# EAGLE board StellaBlue_v04 (EAGLE 9.1.0)
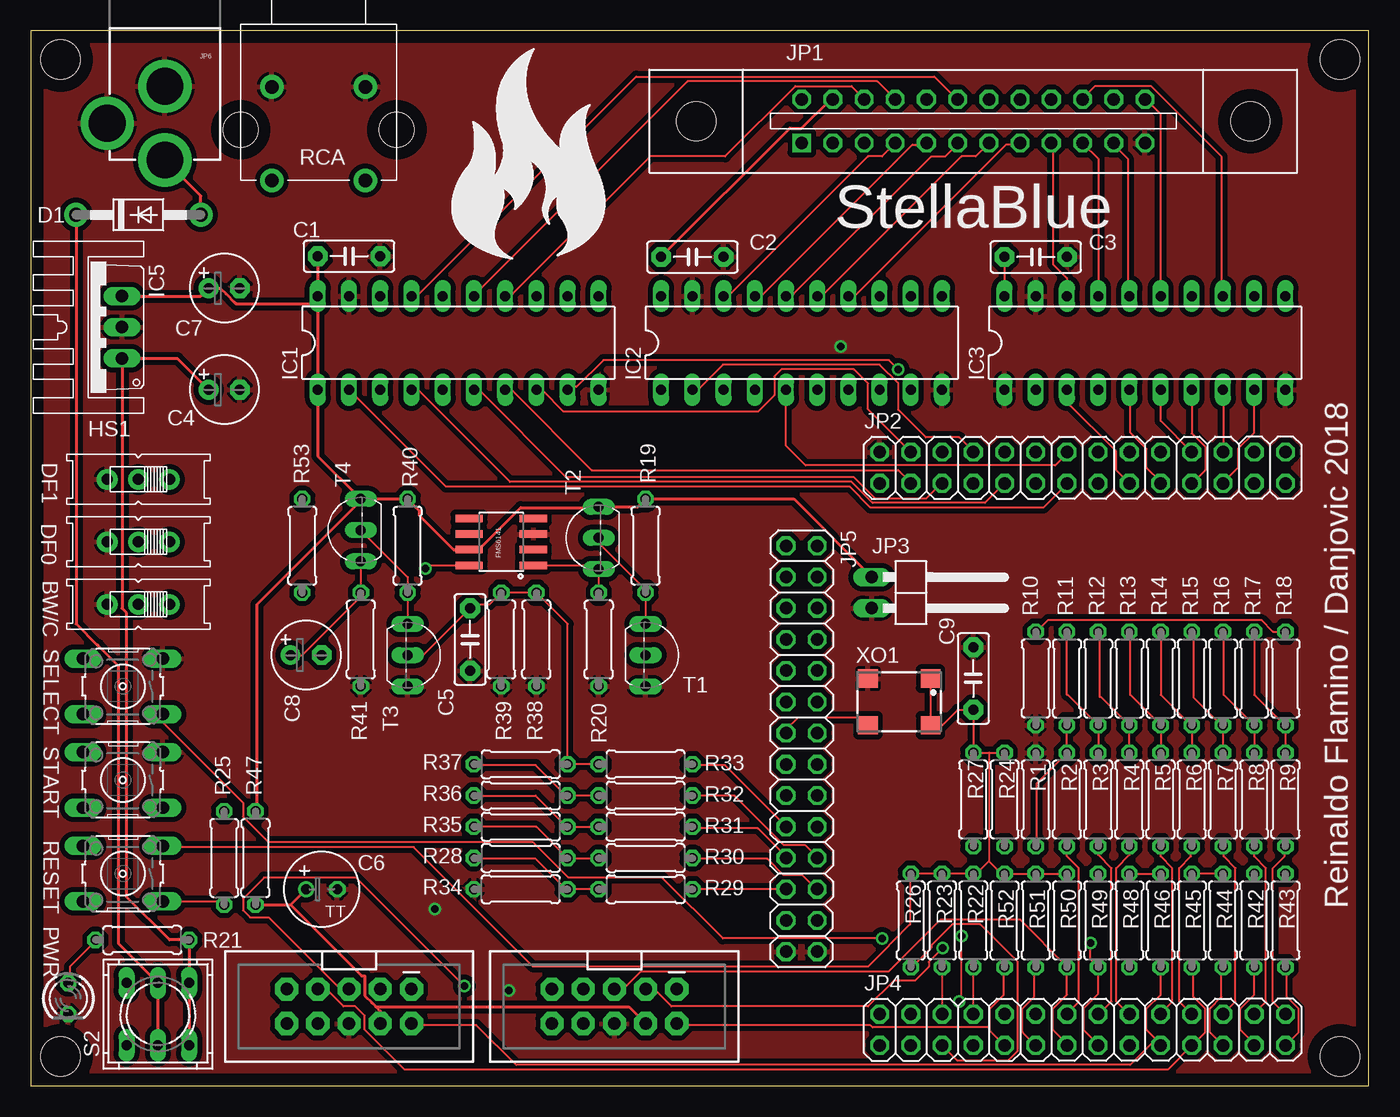
[diagram p0: board, top side]
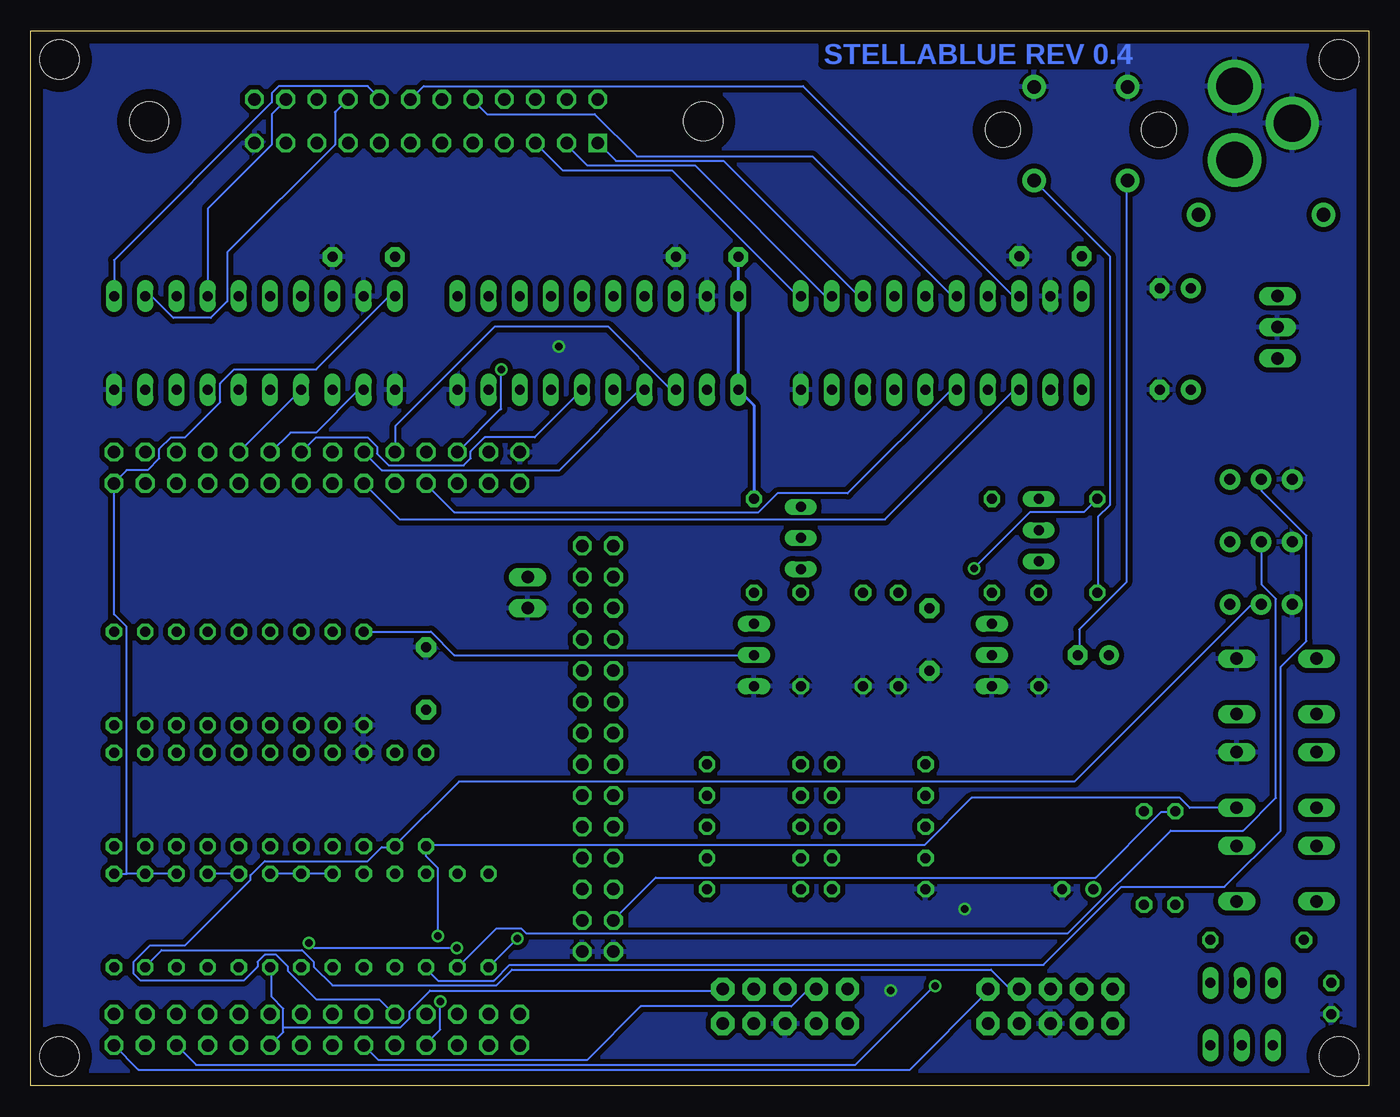
[diagram p1: board, bottom side, seen from below]

Size 108.89 x 85.84 mm. Coordinates in mm from the lower left corner, seen from the top.
Outline: 0,0 108.89,0 108.89,85.84 0,85.84 0,0
Copper layers (1*16): Top 0.035mm / dielectric 1.5mm / Bottom 0.035mm
Design rules "default *": minimum track width 7mil, minimum drill 24mil, track to track 8mil, track to pad 8mil, pad to pad 8mil, via to via 8mil, smd to smd 8mil, copper to edge 40mil, drill to drill 8mil, minimum pad ring 10mil, minimum via ring 8mil, stop-mask expansion 4mil, vias tented up to drill 0mil, thermal gap 10mil
Holes 3.2 mm at 2.41,83.5 2.41,2.41 106.55,2.41 106.55,83.5

## Footprints (pad centres in the part's own frame; a part is rotated, then mirrored left to right if it is on the bottom)
EG1218 = drill 0.9 pad 1.676: O -2.54,0; P 0,0; S 2.54,0
C5B2.5 = drill 0.813 pad 1.6 octagon: 1 -2.54,0; 2 2.54,0
E2,5-6 = drill 0.813 pad 1.6: + -1.27,0 | drill 0.813 pad 1.6 octagon: - 1.27,0
TT2D6 = drill 0.813: + -1.27,0 | drill 0.813 octagon: - 1.27,0
DO41-10 = drill 1.118 pad 1.93: A 5.08,0; C -5.08,0
SO08 = smd 0.61 x 2.21: 1 -1.905,-2.616; 2 -0.635,-2.616; 3 0.635,-2.616; 4 1.905,-2.616; 5 1.905,2.616; 6 0.635,2.616; 7 -0.635,2.616; 8 -1.905,2.616
DIL20 = drill 0.813 long: 1 -11.43,-3.81; 2 -8.89,-3.81; 3 -6.35,-3.81; 4 -3.81,-3.81; 5 -1.27,-3.81; 6 1.27,-3.81; 7 3.81,-3.81; 8 6.35,-3.81; 9 8.89,-3.81; 10 11.43,-3.81; 11 11.43,3.81; 12 8.89,3.81; 13 6.35,3.81; 14 3.81,3.81; 15 1.27,3.81; 16 -1.27,3.81; 17 -3.81,3.81; 18 -6.35,3.81; 19 -8.89,3.81; 20 -11.43,3.81
TO220V = drill 1.016 long: 1 -2.54,-2.54; 2 0,-2.54; 3 2.54,-2.54
2X5-SHROUDED_LOCK = drill 1.016 pad 1.88 octagon: 1 -1.397,5.08; 2 1.397,5.08; 3 -1.397,2.54; 4 1.397,2.54; 5 -1.397,0; 6 1.397,0; 7 -1.397,-2.54; 8 1.397,-2.54; 9 -1.397,-5.08; 10 1.397,-5.08
ATARI2600_SLOT = drill 1.016 square: 1 -13.97,-1.778 | drill 1.016 octagon: 2 -13.97,1.778; 3 -11.43,-1.778; 4 -11.43,1.778; 5 -8.89,-1.778; 6 -8.89,1.778; 7 -6.35,-1.778; 8 -6.35,1.778; 9 -3.81,-1.778; 10 -3.81,1.778; 11 -1.27,-1.778; 12 -1.27,1.778; 13 1.27,-1.778; 14 1.27,1.778; 15 3.81,-1.778; 16 3.81,1.778; 17 6.35,-1.778; 18 6.35,1.778; 19 8.89,-1.778; 20 8.89,1.778; 21 11.43,-1.778; 22 11.43,1.778; 23 13.97,-1.778; 24 13.97,1.778 | hole 3.175: -22.543,0; 22.543,0
2X14 = drill 1.016 octagon: 1 -16.51,-1.27; 2 -16.51,1.27; 3 -13.97,-1.27; 4 -13.97,1.27; 5 -11.43,-1.27; 6 -11.43,1.27; 7 -8.89,-1.27; 8 -8.89,1.27; 9 -6.35,-1.27; 10 -6.35,1.27; 11 -3.81,-1.27; 12 -3.81,1.27; 13 -1.27,-1.27; 14 -1.27,1.27; 15 1.27,-1.27; 16 1.27,1.27; 17 3.81,-1.27; 18 3.81,1.27; 19 6.35,-1.27; 20 6.35,1.27; 21 8.89,-1.27; 22 8.89,1.27; 23 11.43,-1.27; 24 11.43,1.27; 25 13.97,-1.27; 26 13.97,1.27; 27 16.51,-1.27; 28 16.51,1.27
1X02/90 = drill 1.016 long: 1 -1.27,-3.81; 2 1.27,-3.81
POWER_JACK_PTH = drill 2.997 pad 4.318: GND 0,7.7; GNDBREAK 4.7,10.7; PWR 0,13.7
LED3MM = drill 0.813 octagon: A -1.27,0; K 1.27,0
0207/7 = drill 0.813 octagon: 1 -3.81,0; 2 3.81,0
DOUBLE-VERTICAL = drill 1.1 pad 1.93: HG -3.81,3.81; HS -3.81,-3.81; LG 3.81,3.81; LS 3.81,-3.81 | hole 2.8: -6.35,0.318; 6.35,0.318
B3F-10XX = drill 1.016 long: 1 -3.251,2.261; 2 3.251,2.261; 3 -3.251,-2.261; 4 3.251,-2.261
9077-2 = drill 0.813 long: 1 -2.54,2.54; 2 0,2.54; 3 2.54,2.54; 4 -2.54,-2.54; 5 0,-2.54; 6 2.54,-2.54
TO92-EBC = drill 0.813 long: B 0,-1.27; C 2.54,-1.27; E -2.54,-1.27
SM77H = smd 1.6 x 1.5: 1 -2.55,-1.9; 2 2.55,-1.9; 3 2.55,1.9; 4 -2.55,1.9

## Placement (x,y rotation side)
BW/C  [EG1218]  8.76,39.18 180 top
C1  100nf  [C5B2.5]  25.91,67.5 0 top
C2  100nf  [C5B2.5]  53.85,67.44 0 top
C3  100nf  [C5B2.5]  81.79,67.44 0 top
C4  10uf  [E2,5-6]  15.75,56.64 0 top
C5  11nf  [C5B2.5]  35.75,36.32 270 top
C6  10uf  [TT2D6]  23.69,16 0 top
C7  10uf  [E2,5-6]  15.75,64.9 0 top
C8  10uf  [E2,5-6]  22.42,35.05 0 top
C9  10nf  [C5B2.5]  76.71,33.15 90 top
D1  1N4004  [DO41-10]  8.76,70.87 0 top
DF0  [EG1218]  8.76,44.26 180 top
DF1  [EG1218]  8.76,49.34 180 top
FMS6141  GENERIC-SOIC8MSGEQ7N-FILTER  [SO08]  38.29,44.26 90 top
HS1  AA  [AA]  0.19,61.72 270 top
IC1  74LS245N  [DIL20]  34.8,60.45 0 top
IC2  74LS245N  [DIL20]  62.74,60.45 0 top
IC3  74LS245N  [DIL20]  90.68,60.45 0 top
IC5  7805TV  [TO220V]  4.89,61.72 90 top
JOY1  JOY1  [2X5-SHROUDED_LOCK]  25.91,6.48 270 top
JOY2  JOY2  [2X5-SHROUDED_LOCK]  47.5,6.48 270 top
JP1  CARTRIDGE SOCKET  [ATARI2600_SLOT]  76.71,78.49 0 top
JP2  [2X14]  85.6,50.29 0 top
JP3  [1X02/90]  72.26,40.13 270 top
JP4  [2X14]  85.6,4.57 0 top
JP5  [2X14]  62.74,27.43 270 top
JP6  POWER_JACKPTH  [POWER_JACK_PTH]  10.92,89.03 180 top
PWR  [LED3MM]  3.05,7.11 270 top
R1  2k  [0207/7]  81.79,23.3 90 top
R2  2k  [0207/7]  84.33,23.3 90 top
R3  2k  [0207/7]  86.87,23.3 90 top
R4  2k  [0207/7]  89.41,23.3 90 top
R5  2k  [0207/7]  91.95,23.3 90 top
R6  2k  [0207/7]  94.49,23.3 90 top
R7  2k  [0207/7]  97.03,23.3 90 top
R8  2k  [0207/7]  99.57,23.3 90 top
R9  2k  [0207/7]  102.11,23.3 90 top
R10  2k  [0207/7]  81.79,33.15 90 top
R11  1k  [0207/7]  84.33,33.15 270 top
R12  1k  [0207/7]  86.87,33.15 270 top
R13  1k  [0207/7]  89.41,33.15 270 top
R14  1k  [0207/7]  91.95,33.15 270 top
R15  1k  [0207/7]  94.49,33.15 270 top
R16  1k  [0207/7]  97.03,33.15 270 top
R17  1k  [0207/7]  99.57,33.15 270 top
R18  1k  [0207/7]  102.11,33.15 270 top
R19  1k  [0207/7]  50.04,43.94 90 top
R20  1k  [0207/7]  46.23,36.32 90 top
R21  1k  [0207/7]  9.08,11.87 0 top
R22  1k  [0207/7]  76.71,13.46 90 top
R23  1k  [0207/7]  74.17,13.46 90 top
R24  1k  [0207/7]  79.25,23.3 90 top
R25  1k  [0207/7]  15.75,18.54 270 top
R26  1k  [0207/7]  71.63,13.46 90 top
R27  1k  [0207/7]  76.71,23.3 90 top
R28  2k  [0207/7]  39.88,16 0 top
R29  2k  [0207/7]  50.04,16 180 top
R30  2k  [0207/7]  50.04,18.54 180 top
R31  2k  [0207/7]  50.04,21.08 180 top
R32  2k  [0207/7]  50.04,23.62 180 top
R33  2k  [0207/7]  50.04,26.16 180 top
R34  1k  [0207/7]  39.88,18.54 180 top
R35  1k  [0207/7]  39.88,21.08 180 top
R36  1k  [0207/7]  39.88,23.62 180 top
R37  1k  [0207/7]  39.88,26.16 180 top
R38  1k  [0207/7]  41.15,36.32 90 top
R39  1k  [0207/7]  38.29,36.32 90 top
R40  1k  [0207/7]  30.67,43.94 90 top
R41  1k  [0207/7]  26.86,36.32 90 top
R42  1k  [0207/7]  99.57,13.46 270 top
R43  1k  [0207/7]  102.11,13.46 270 top
R44  1k  [0207/7]  97.03,13.46 270 top
R45  1k  [0207/7]  94.49,13.46 270 top
R46  1k  [0207/7]  91.95,13.46 270 top
R47  1k  [0207/7]  18.29,18.54 90 top
R48  1k  [0207/7]  89.41,13.46 270 top
R49  1k  [0207/7]  86.87,13.46 270 top
R50  1k  [0207/7]  84.33,13.46 270 top
R51  1k  [0207/7]  81.79,13.46 270 top
R52  1k  [0207/7]  79.25,13.46 270 top
R53  75  [0207/7]  22.1,43.94 90 top
RCA  DOUBLE_VERTICAL  [DOUBLE-VERTICAL]  23.43,77.47 0 top
RESET  [B3F-10XX]  7.49,17.27 180 top
S2  PWR-SW  [9077-2]  10.35,5.84 180 top
SELECT  [B3F-10XX]  7.49,32.51 180 top
START  [B3F-10XX]  7.49,24.89 180 top
T1  2N3906  [TO92-EBC]  51.31,35.05 270 top
T2  2N3904  [TO92-EBC]  44.96,44.58 90 top
T3  2N3906  [TO92-EBC]  31.94,35.05 270 top
T4  2N3904  [TO92-EBC]  25.59,45.21 90 top
XO1  14.318MHz  [SM77H]  70.68,31.24 180 top

## Library data of the parts
BW/C D1 DF0 DF1 = adafruit
C1-C3 C5 C9 = capacitor-wima
C4 C6-C8 R1-R53 = resistor
FMS6141 = SparkFun-AnalogIC; PROD_ID: IC-10141
HS1 = heatsink
IC1-IC3 = 74xx-us
IC5 = linear
JOY1 JOY2 = SparkFun-Connectors
JP1 = atari2600 card edge
JP2-JP5 = pinhead
JP6 = SparkFun-Connectors; PROD_ID: CONN-08197
PWR = led
RCA = con-rca-board
RESET SELECT START = switch-omron; MPN: B3F-1000; OC_FARNELL: 176432; OC_NEWARK: 36M3542
S2 = switch-misc
T1-T4 = transistor-neu-to92
XO1 = crystal

## Nets
14.318MHZ: JP5.13 XO1.3
+3V3: C3.1 C9.1 IC3.20 JP2.27 R22.2 R23.2 R24.2 R26.2 R27.2 R42.1 R43.1 R44.1 R45.1 R46.1 R48.1 R49.1 R50.1 R51.1 R52.1 RESET.3 XO1.1 XO1.4
+5V: C1.1 C2.1 C7.+ FMS6141.7 IC1.1 IC1.20 IC2.1 IC2.20 IC5.3 JP1.4 JP3.1 R19.2 R40.2 R47.2 T2.C T4.C
AD0: JP5.23 R29.1
AD1: JP5.24 R30.1
AD2: JP5.21 R31.1
AD3: JP5.22 R32.1
AD4: JP5.19 R33.1
ADO: C5.1 R33.2 R37.1 R38.2 R39.2 T3.B
AUDIO: C8.+ R41.2 T4.E
CL: BW/C.P JP4.10 R24.1
CV: R10.2 R18.1 T1.B
CV0: JP4.14 R2.1
CV1: JP4.16 R3.1
CV2: JP4.18 R4.1
CV3: JP4.20 R5.1
CV4: JP4.22 R6.1
CV5: JP4.24 R7.1
CV6: JP4.26 R8.1
CV7: JP4.28 R9.1
CVOUT: FMS6141.1 R20.2 T2.E
DF0: DF0.P JP4.6 R23.1
DF1: DF1.P JP4.8 R22.1
GND: BW/C.S C1.2 C2.2 C3.2 C4.- C5.2 C6.- C7.- C9.2 DF0.S DF1.S FMS6141.3 IC1.10 IC1.19 IC2.10 IC2.19 IC3.1 IC3.10 IC3.19 IC5.2 JOY1.6 JOY2.6 JP1.23 JP2.2 JP3.2 JP5.27 JP5.28 JP6.GND JP6.GNDBREAK PWR.K R1.2 R10.1 R20.1 R28.1 R38.1 R39.1 R41.1 RCA.HG RCA.LG SELECT.3 START.3 T1.C T3.C XO1.2
J+5V: C6.+ JOY1.4 JOY2.4 R47.1
JD2: JOY2.3 JP4.15 R49.2
JDW: JOY1.3 JP4.25 R42.2
JF2: JOY2.2 JP4.9 R52.2
JFR: JOY1.2 JP4.19 R46.2
JL2: JOY2.5 JP4.13 R50.2
JLF: JOY1.5 JP4.23 R44.2
JR2: JOY2.7 JP4.11 R51.2
JRG: JOY1.7 JP4.21 R45.2
JU2: JOY2.1 JP4.17 R48.2
JUP: JOY1.1 JP4.27 R43.2
N$1: IC1.18 JP1.14
N$2: IC1.17 JP1.12
N$3: IC1.16 JP1.10
N$4: IC1.15 JP1.8
N$5: IC1.14 JP1.6
N$6: IC1.13 JP1.1
N$7: IC1.12 JP1.3
N$8: IC1.11 JP1.5
N$9: IC2.18 JP1.7
N$10: IC2.17 JP1.9
N$11: IC2.16 JP1.11
N$12: IC2.15 JP1.13
N$13: IC2.14 JP1.15
N$14: IC3.18 JP1.17
N$15: IC3.17 JP1.19
N$16: IC3.16 JP1.21
N$17: IC3.15 JP1.24
N$18: IC3.14 JP1.22
N$19: IC3.13 JP1.20
N$20: IC3.12 JP1.18
N$21: IC3.11 JP1.16
N$22: IC1.2 JP2.13
N$23: IC1.3 JP2.11
N$24: IC1.4 JP2.9
N$25: IC1.5 JP2.7
N$26: IC1.6 JP2.5
N$27: IC1.7 JP2.3
N$28: IC1.8 JP2.4
N$29: IC1.9 JP2.6
N$30: IC2.2 JP2.8
N$31: IC2.3 JP2.10
N$32: IC2.4 JP2.12
N$33: IC2.5 JP2.14
N$34: IC2.6 JP2.16
N$35: IC3.2 JP2.18
N$36: IC3.3 JP2.17
N$37: IC3.4 JP2.20
N$38: IC3.5 JP2.19
N$39: IC3.6 JP2.22
N$40: IC3.7 JP2.21
N$41: IC3.8 JP2.24
N$42: IC3.9 JP2.23
N$43: D1.A JP6.PWR
N$44: D1.C S2.2 S2.5
N$45: R1.1 R2.2 R11.2
N$46: R3.2 R11.1 R12.2
N$47: R53.1 RCA.LS
N$49: C4.+ IC5.1 R21.2 S2.1 S2.4
N$50: R4.2 R12.1 R13.2
N$51: R5.2 R13.1 R14.2
N$52: R6.2 R14.1 R15.2
N$53: R7.2 R15.1 R16.2
N$54: R8.2 R16.1 R17.2
N$55: R9.2 R17.1 R18.2
N$57: R19.1 T1.E T2.B
N$58: PWR.A R21.1
N$59: R25.2 RESET.1
N$62: R28.2 R29.2 R34.2
N$63: R30.2 R34.1 R35.2
N$64: R31.2 R35.1 R36.2
N$65: R32.2 R36.1 R37.2
N$67: R40.1 T3.E T4.B
N$68: C8.- RCA.HS
RST: JP5.25 R25.1
SL: JP4.5 R26.1 SELECT.1
ST: JP4.7 R27.1 START.1
VIDEO: FMS6141.8 R53.2

## Tracks (layer width: path | path; a pad name or v marks a point on that pad's centre or on a via)
14.318MHZ
  Top 0.178: XO1.3 67.49,29.97 62.42,29.97 61.47,29.02 JP5.13
+3V3
  Top 0.178: R44.1 R45.1 | XO1.1 XO1.4 74.17,29.34 75.44,30.61 C9.1 R27.2 77.98,27.11 | 77.98,27.11 R24.2 | 77.98,27.11 77.98,18.29 | 77.98,18.29 78.99,17.27 R52.1 R51.1 R50.1 | R48.1 R46.1 | 77.98,18.29 76.96,17.27 R22.2 R23.2 R26.2 71.56,17.21 71.56,13.14 68.13,9.72 40.89,9.72 31.18,19.43 10.85,19.43 RESET.3 | C3.1 IC3.20
  Bottom 0.178: R50.1 R49.1 R48.1 | R46.1 R45.1 | R44.1 R42.1 101.03,17.27 | 101.03,17.27 101.09,17.34 101.09,37.34 102.11,38.35 102.11,49.09 | R43.1 101.03,17.27 | IC3.20 79.31,64.2 79.76,64.2 85.66,58.29 92.33,58.29 93.47,57.15 93.47,55.63 96.33,52.77 97.47,52.77 98.42,51.82 98.42,51.05 99.38,50.1 101.09,50.1 102.11,49.09 | 102.11,49.09 JP2.27
+5V
  Top 0.178: 65.28,80.2 JP1.4
  Top 0.254: 23.37,63.63 IC1.1 23.37,51.24 T4.C | 23.37,63.63 16.7,63.63 16.56,63.77 16.55,63.77 15.89,64.43 15.89,64.44 15.43,64.9 C7.+ 13.84,64.26 IC5.3 | T4.C R40.2 31.62,46.8 31.62,46.43 34.43,43.62 FMS6141.7 36.45,43.62 39.88,47.05 46.16,47.05 T2.C 49.4,47.12 R19.2 62.1,47.75 JP3.1 | 18.41,39.18 26.86,47.62 T4.C | C2.1 61.79,77.92 62.74,77.92 65.02,80.2 65.28,80.2 | 18.41,39.18 | R47.2 18.41,22.48 18.41,39.18 | C1.1 IC1.20 23.37,63.63
  Bottom 0.254: R19.2 50.04,55.37 IC2.1 IC2.20 C2.1
AD0
  Top 0.178: JP5.23 R29.1
AD1
  Top 0.178: R30.1 53.85,18.48 59.94,18.48 61.28,17.14 62.8,17.14 63.95,16 JP5.24
AD2
  Top 0.178: R31.1 53.85,20.96 59.18,20.96 61.47,18.67 JP5.21
AD3
  Top 0.178: R32.1 57.28,23.62 61.28,19.62 62.99,19.62 64.01,18.61 JP5.22
AD4
  Top 0.178: R33.1 53.85,26.1 56.52,26.1 61.47,21.15 JP5.19
ADO
  Top 0.178: T3.B 31.94,35.05 C5.1 36.07,39.18 37.34,39.18 R39.2 R38.2 43.69,37.59 R37.1 R33.2
AUDIO
  Top 0.178: T4.E R41.2 26.86,39.81 22.1,35.05 C8.+
CL
  Bottom 0.178: BW/C.P 8.89,39.05 9.65,39.05 23.94,24.77 74.04,24.77 79.31,19.5 79.31,19.43 | 79.31,19.43 80.33,19.43 81.47,18.29 89.85,18.29 90.99,17.14 90.99,16.76 96.33,11.43 99.19,11.43 100.52,10.1 100.52,9.14 99.95,8.57 91.57,8.57 90.42,9.72 90.42,10.1 89.85,10.67 88.9,10.67 87.95,9.72 87.95,9.33 85.66,7.05 80.52,7.05 79.31,5.84 JP4.10 | 79.31,19.43 R24.1
CV
  Top 0.178: R18.1 101.09,36.96 100.14,37.91 82.8,37.91 81.85,36.96 R10.2
  Bottom 0.178: T1.B 74.42,35.05 76.33,36.96 R10.2
CV0
  Top 0.178: R2.1 84.33,18.67 85.28,17.72 85.28,6.86 84.33,5.91 JP4.14
CV1
  Top 0.178: R3.1 86.87,18.8 87.95,17.72 87.95,6.86 86.93,5.84 JP4.16
CV2
  Top 0.178: JP4.18 89.34,5.84 88.33,6.86 88.33,17.72 89.41,18.8 R4.1
CV3
  Top 0.178: R5.1 91.95,18.67 92.9,17.72 92.9,6.86 91.95,5.91 JP4.20
CV4
  Top 0.178: JP4.22 93.47,6.86 93.47,17.72 94.42,18.67 94.42,19.43 R6.1
CV5
  Top 0.178: JP4.24 98.04,6.86 98.04,17.72 97.09,18.67 97.09,19.43 R7.1
CV6
  Top 0.178: R8.1 99.57,18.67 100.52,17.72 100.52,6.86 99.57,5.91 JP4.26
CV7
  Top 0.178: JP4.28 101.09,6.86 101.09,17.72 102.05,18.67 102.05,19.43 R9.1
CVOUT
  Top 0.178: FMS6141.1 45.91,42.36 T2.E R20.2
DF0
  Top 0.178: R23.1 JP4.6
  Bottom 0.178: DF0.P 8.7,44.2 8.7,40.77 7.56,39.62 7.56,23.43 10.22,20.77 16.13,20.77 24.51,12.38 68.53,12.38 68.95,12.8 71.02,12.8 R23.1
DF1
  Top 0.178: JP4.8 R22.1
  Bottom 0.178: DF1.P 8.7,49.34 8.7,48.39 5.08,44.77 5.08,36.2 7.18,34.1 7.18,20.77 11.75,16.19 20.13,16.19 26.48,9.84 69.91,9.84 71.18,8.57 75.76,8.57 76.71,9.53 R22.1
GND  (via drill 0.61)
  other vias: 38.93,7.75 32.89,14.41 65.91,60.13
  pour Bottom (isolate 0.406): 0,86.17 108.97,86.17 108.97,0 0,0
  pour Top (isolate 0.406): 0.32,85.85 109.28,85.85 108.97,0 0,0
J+5V
  Top 0.254: R47.1 21.14,14.73 | 21.14,14.73 C6.+ | 21.14,14.73 26.92,8.95 27.18,8.95 27.18,7.35 27.77,6.75 28.09,6.44 | JOY1.4 28.45,6.08 28.09,6.44 | 28.09,6.44 48.68,6.44 JOY2.4
JD2  (via drill 0.61)
  Top 0.178: v74.23,11.24 73.09,10.1 73.09,9.72 71.95,8.57 70.23,8.57 68.13,6.48 52.13,6.48 50.8,7.81 50.04,7.81 JOY2.3 | v86.23,11.62 86.23,10.29 R49.2 86.87,7.49 85.66,6.29 85.66,4.57 86.87,3.37 JP4.15
  Bottom 0.178: v74.23,11.24 85.85,11.24 v86.23,11.62
JDW
  Top 0.178: R42.2 99.57,7.43 98.42,6.29 98.42,4.57 99.57,3.43 JP4.25
  Bottom 0.178: R42.2 99.57,9.72 98.23,11.05 86.8,11.05 85.85,10.1 85.85,9.72 84.33,8.19 70.99,8.19 69.72,9.46 30.73,9.46 29.27,8 28.57,8 JOY1.3
JF2
  Top 0.178: 78.04,4.76 78.04,6.29 79.19,7.43 79.19,9.59 R52.2 | 78.04,4.76 68.52,4.76 68.33,4.95 52.71,4.95 JOY2.2 | JP4.9 78.04,4.51 78.04,4.76
JFR
  Top 0.178: R46.2 91.95,7.43 90.8,6.29 90.8,4.57 91.57,3.81 | 91.57,3.81 89.47,1.71 39.5,1.71 36.26,4.95 30.99,4.95 JOY1.2 | JP4.19 91.95,3.43 91.57,3.81
JL2
  Top 0.178: JP4.13 84.33,3.43 83.19,4.57 83.19,6.29 84.33,7.43 R50.2 84.33,9.72 80.52,13.53 74.04,13.53 69.85,9.33 49.66,9.33 48.2,7.87 JOY2.5
JLF  (via drill 0.61)
  Top 0.178: JP4.23 95.95,4.38 95.95,6.29 96.9,7.24 96.9,9.53 R44.2 | v35.31,8.13 26.48,16.95 18.99,16.95 17.27,15.24 17.27,14.29 17.84,13.72 19.37,13.72 25.08,8 25.78,8 JOY1.5
  Bottom 0.178: v35.31,8.13 35.37,8.13 41.78,1.71 95.44,1.71 JP4.23
JR2
  Top 0.178: R51.2 81.66,9.53 81.66,7.24 80.71,6.29 80.71,4.38 JP4.11
  Bottom 0.178: JOY2.7 45.59,7.87 46.99,6.48 59.25,6.48 63.63,2.09 80.58,2.09 JP4.11
JRG
  Top 0.178: R45.2 94.61,9.53 94.61,7.24 95.57,6.29 95.57,4.38 JP4.21 92.52,1.33 30.42,1.33 27.18,4.57 27.18,5.71 26.42,6.48 25.46,6.48 24.13,7.81 23.37,7.81 JOY1.7
JU2
  Bottom 0.178: 88.33,4.76 88.33,4.38 JP4.17 | 88.33,4.76 88.33,6.29 89.28,7.24 89.28,9.53 R48.2 | 88.33,4.76 78.8,4.76 78.04,5.53 78.04,6.1 76.39,7.75 52.71,7.75 JOY2.1
JUP
  Top 0.178: JP4.27 103.19,4.38 103.19,6.29 102.23,7.24 102.23,9.53 R43.2
  Bottom 0.178: JP4.27 100.14,1.33 37.34,1.33 30.99,7.68 JOY1.1
N$1
  Bottom 0.178: JP1.14 76.9,81.34 46.04,81.34 29.08,64.39 28.57,64.39 IC1.18
N$2
  Top 0.178: IC1.17 30.99,64.39 31.56,64.39 49.28,82.11 73.53,82.11 75.38,80.26 JP1.12
N$3
  Bottom 0.178: IC1.16 33.66,64.39 34.04,64.39 45.28,75.63 59.56,75.63 62.99,79.06 71.75,79.06 72.9,80.2 JP1.10
N$4
  Top 0.178: JP1.8 68.9,81.72 53.47,81.72 36.07,64.33 IC1.15
N$5
  Top 0.178: IC1.14 38.61,64.39 39.18,64.39 50.42,75.63 56.52,75.63 62.23,81.34 66.8,81.34 67.82,80.33 JP1.6
N$6
  Bottom 0.178: JP1.1 61.28,75.25 52.52,75.25 41.66,64.39 41.28,64.39 IC1.13
N$7
  Bottom 0.178: JP1.3 65.28,76.58 63.56,74.87 54.8,74.87 44.2,64.26 IC1.12
N$8
  Bottom 0.178: IC1.11 46.23,64.39 46.61,64.39 56.71,74.49 65.6,74.49 JP1.5
N$9
  Top 0.178: JP1.7 69.28,75.63 68.13,75.63 56.9,64.39 56.52,64.39 IC2.18
N$10
  Top 0.178: JP1.9 72.9,76.58 71.75,76.58 59.44,64.26 IC2.17
N$11
  Top 0.178: IC2.16 61.47,64.39 62.04,64.39 73.28,75.63 74.42,75.63 75.44,76.64 JP1.11
N$12
  Top 0.178: JP1.13 76.9,75.63 75.76,75.63 64.52,64.39 64.14,64.39 IC2.15
N$13
  Top 0.178: JP1.15 80.52,76.58 79.38,76.58 67.18,64.39 66.67,64.39 IC2.14
N$14
  Top 0.178: IC3.18 84.33,65.72 83.19,66.86 83.19,76.58 JP1.17
N$15
  Top 0.178: JP1.19 86.87,75.44 IC3.17
N$16
  Top 0.178: IC3.16 89.28,64.39 89.28,75.44 88.14,76.58 JP1.21
N$17
  Top 0.178: IC3.15 91.95,79.06 90.74,80.26 JP1.24
N$18
  Bottom 0.178: JP1.22 88.14,80.2 89.28,79.06 89.28,76.58 94.49,71.37 IC3.14
N$19
  Top 0.178: IC3.13 96.9,64.39 96.9,75.63 91.19,81.34 86.61,81.34 85.6,80.33 JP1.20
N$20
  Bottom 0.178: IC3.12 99.57,64.2 99,64.2 97.28,62.48 94.23,62.48 92.9,63.82 92.9,67.82 84.14,76.58 84.14,79.18 84.14,79.25 84.07,79.25 JP1.18
N$21
  Bottom 0.178: JP1.16 80.52,80.39 81.47,81.34 88.71,81.34 89.28,80.77 89.28,80.01 102.11,67.18 IC3.11
N$22
  Top 0.178: JP2.13 84.33,48.96 82.42,47.05 68.33,47.05 66.61,48.77 33.78,48.77 IC1.2
N$23
  Bottom 0.178: IC1.3 28.51,56.58 28.89,56.58 39.37,46.1 78.87,46.1 JP2.11
N$24
  Top 0.178: JP2.9 77.66,47.43 68.52,47.43 66.8,49.15 38.99,49.15 31.56,56.58 30.99,56.58 IC1.4
N$25
  Bottom 0.178: JP2.7 76.71,48.96 74.42,46.67 49.66,46.67 48.13,48.2 42.42,48.2 33.97,56.64 IC1.5
N$26
  Top 0.178: IC1.6 36.13,56.58 36.51,56.58 43.56,49.53 66.99,49.53 68.71,47.81 72.9,47.81 74.1,49.02 JP2.5
N$27
  Top 0.178: IC1.7 38.61,56.58 39.18,56.58 45.66,50.1 70.61,50.1 71.63,49.09 JP2.3
N$28
  Top 0.178: JP2.4 68.13,55.05 68.13,57.15 66.99,58.29 61.09,58.29 60.52,57.72 60.52,56.2 59.18,54.86 43.37,54.86 41.66,56.58 41.21,56.58 IC1.8
N$29  (via drill 0.61)
  Top 0.178: v70.61,58.29 69.85,59.05 46.61,59.05 44.42,56.86 43.91,56.86 IC1.9
  Bottom 0.178: v70.61,58.29 70.61,55.05 70.68,55.05 JP2.6
N$30
  Top 0.178: IC2.2 53.85,56.77 54.42,56.77 56.32,58.67 69.09,58.67 70.61,57.15 70.61,54.99 72.83,52.77 75.56,52.77 76.71,51.63 JP2.8
N$31
  Bottom 0.178: IC2.3 56.52,56.77 56.9,56.77 61.91,61.79 71.12,61.79 79.19,53.72 79.19,51.63 JP2.10
N$32
  Bottom 0.178: JP2.12 80.33,50.1 65.85,50.1 59.37,56.58 58.99,56.58 IC2.4
N$33
  Top 0.178: JP2.14 84.33,51.44 83.38,50.48 63.05,50.48 61.47,52.07 IC2.5
N$34
  Bottom 0.178: JP2.16 85.66,52.77 81.47,52.77 80.71,52.01 80.71,51.44 79.76,50.48 73.66,50.48 73.09,51.05 73.09,51.63 71.95,52.77 67.88,52.77 IC2.6
N$35
  Bottom 0.178: IC3.2 81.85,56.58 82.23,56.58 85.66,53.15 87.76,53.15 89.34,51.56 JP2.18
N$36
  Top 0.178: IC3.3 84.33,55.63 88.33,51.63 88.33,50.1 JP2.17
N$37
  Bottom 0.178: IC3.4 JP2.20
N$38
  Top 0.178: IC3.5 89.47,56.58 89.47,53.15 90.8,51.82 90.8,50.29 91.95,49.15 JP2.19
N$39
  Top 0.178: IC3.6 91.95,54.1 JP2.22
N$40
  Top 0.178: JP2.21 95.57,50.1 95.57,52.01 94.49,53.09 IC3.7
N$41
  Top 0.178: IC3.8 97.09,56.58 97.09,51.63 JP2.24
N$42
  Top 0.178: IC3.9 99.57,53.15 98.23,51.82 98.23,50.29 97.03,49.09 JP2.23
N$43
  Top 0.254: D1.A 13.84,72.41 JP6.PWR
N$44
  Top 0.254: S2.2 S2.5 7.14,11.6 7.14,34.18 5.46,35.87 5.41,35.87 3.68,37.59 D1.C
N$45
  Top 0.178: R11.2 R2.2 84.33,27.05 81.85,24.57 81.85,19.56 R1.1
N$46
  Top 0.178: R11.1 84.33,31.81 84.39,31.81 R12.2 R3.2
N$47
  Bottom 0.178: R53.1 22.03,40.2 22.03,46.29 21.08,47.24 21.08,67.5 RCA.LS
N$49
  Top 0.254: S2.1 S2.4 R21.2 11.3,11.88 7.81,15.37 7.81,38.48 7.43,38.86 | C4.+ 11.94,59.18 IC5.1 7.43,38.86 | 7.43,38.86 | 7.43,38.86
N$50
  Top 0.178: R12.1 86.99,36.96 86.99,31.62 87.12,31.62 R13.2 R4.2
N$51
  Top 0.178: R5.2 R14.2 89.47,31.81 89.47,36.96 R13.1
N$52
  Top 0.178: R14.1 91.95,31.81 94.42,29.34 R15.2 R6.2
N$53
  Top 0.178: R15.1 94.61,36.96 94.61,31.62 96.9,29.34 R16.2 R7.2
N$54
  Top 0.178: R8.2 R17.2 97.09,31.81 97.09,36.96 R16.1
N$55
  Top 0.178: R17.1 99.57,31.81 102.05,29.34 R18.2 R9.2
N$57
  Top 0.178: T1.E R19.1 50.04,40.39 46.23,44.2 T2.B
N$58
  Top 0.178: PWR.A 3.17,8.38 3.17,9.72 5.27,11.81 R21.1
N$59
  Top 0.178: RESET.1 15.47,15.01 R25.2
N$62
  Top 0.178: R29.2 R28.2 43.56,16 41.09,18.48 36.13,18.48 R34.2
N$63
  Top 0.178: R30.2 R34.1 41.15,21.08 R35.2
N$64
  Top 0.178: R36.2 41.09,23.62 43.62,21.08 R35.1 R31.2
N$65
  Top 0.178: R32.2 R36.1 43.56,23.62 41.09,26.1 36.13,26.1 R37.2
N$67
  Top 0.178: T4.B 30.67,41.4 R40.1 T3.E
N$68
  Bottom 0.178: C8.- 23.56,35.05 23.56,37.15 19.75,40.96 19.75,73.53 RCA.HS
RST
  Bottom 0.178: R25.1 15.75,22.29 16.89,22.29 22.22,16.95 58.04,16.95 61.47,13.53 JP5.25
SL  (via drill 0.61)
  Top 0.178: JP4.5 75.38,2.09 79.57,2.09 80.33,2.86 80.33,10.1 77.28,13.14 74.99,13.14 73.28,11.43 73.28,11.24 71.69,9.65 R26.1 | v69.28,12 56.32,12 51.37,16.95 43.75,16.95 40.89,19.81 19.37,19.81 17.27,21.91 17.27,23.05 10.74,29.58 SELECT.1
  Bottom 0.178: R26.1 v69.28,12
ST  (via drill 0.61)
  Top 0.178: v75.76,12.19 75.76,7.05 v75.56,6.86
  Bottom 0.178: v75.76,12.19 75.76,17.72 76.71,18.67 R27.1 76.71,19.62 36.13,19.62 32.32,23.43 15.37,23.43 14.57,22.63 START.1 | v75.56,6.86 75.56,4.57 76.71,3.43 JP4.7
VIDEO  (via drill 0.61)
  Top 0.178: FMS6141.8 32.38,42.36 v32.13,42.1
  Bottom 0.178: v32.13,42.1 27.56,46.67 23.18,46.67 R53.2

## Text on the board
Bottom: STELLABLUE REV 0.4
tPlace: StellaBlue | Reinaldo Flamino / Danjovic 2018
tDocu: GND